# Allegro board arduino_mega_tft_3p5_shield.brd
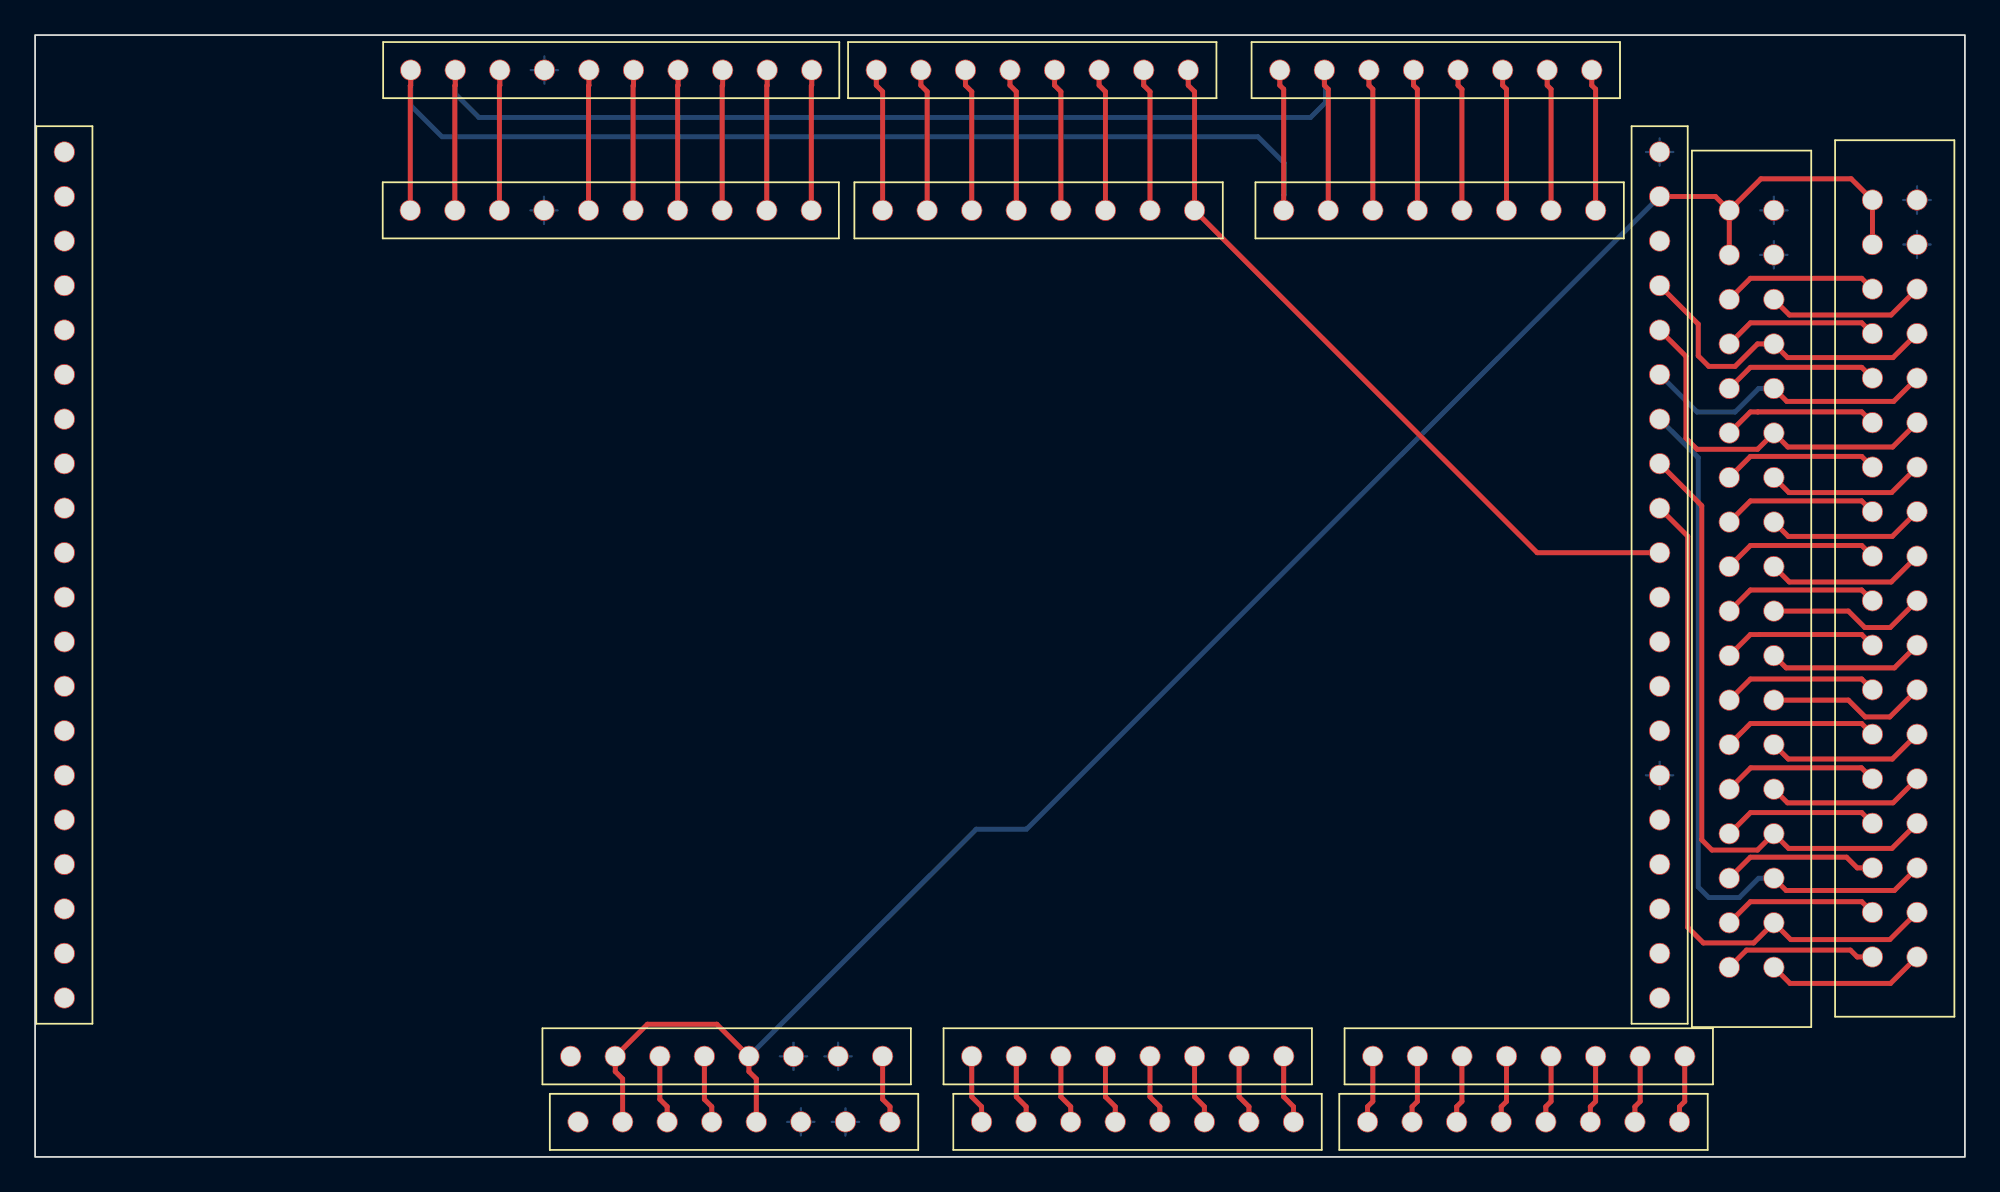
[diagram p0: board, top side]
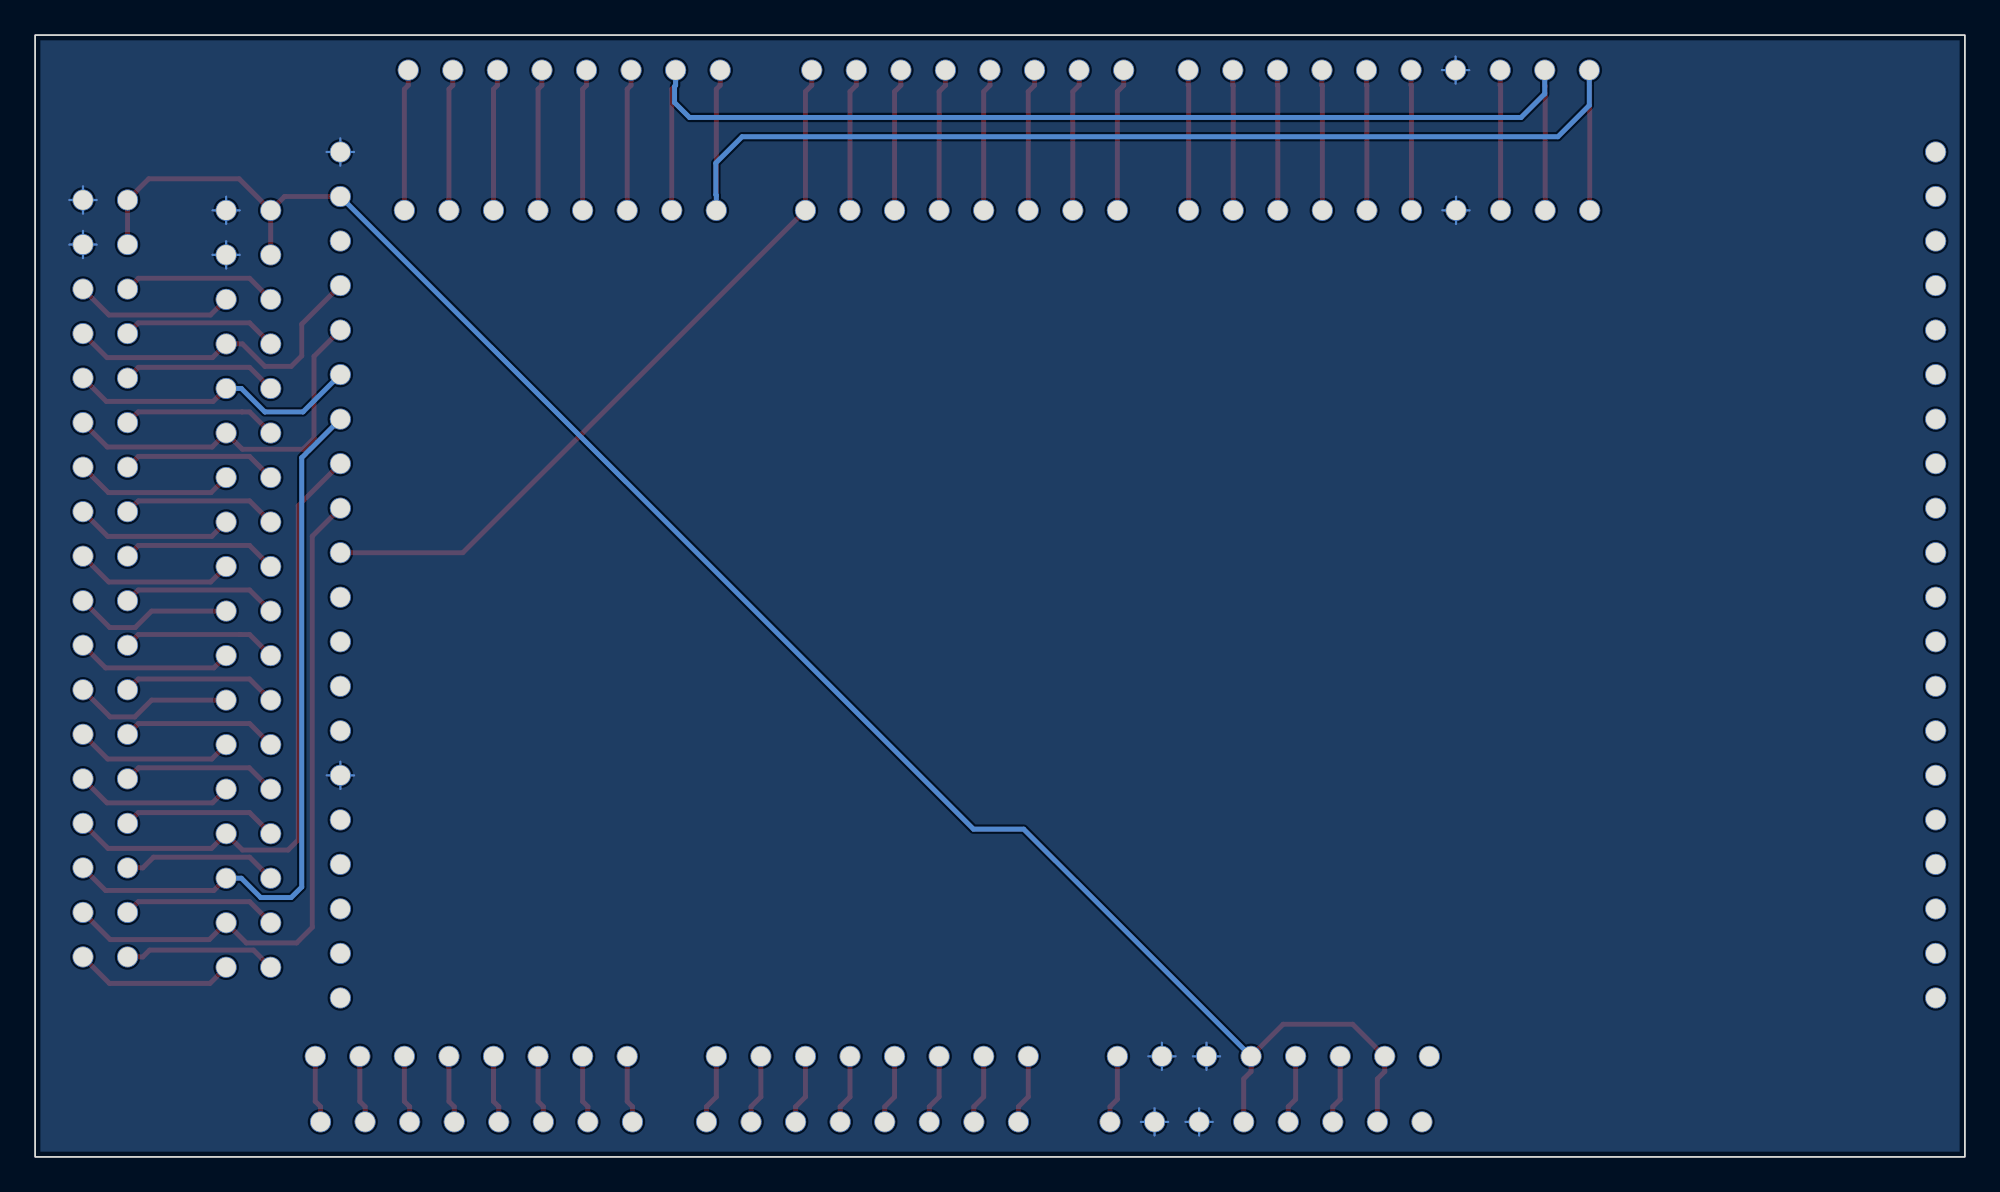
[diagram p1: board, bottom side, seen from below]

Outline 110 x 64 mm; copper layers: TOP, BOTTOM. Coordinates in mm from the lower left corner of the outline.
Outline path: rectangle 0,0 110,64

## Design rules (mm)
constraint set DEFAULT: min track width 0.127

## Placement (name value [footprint] x y rotation side)
ADCH  FH254-108DF08500V  [1X08]  84.84 2 90 top
ADCH1  FH254-108DF08500V  [1X08]  85.14 5.74 90 top
ADCL  FH254-108DF08500V  [1X08]  62.28 5.74 90 top
ADCL1  FH254-108DF08500V  [1X08]  62.84 2 90 top
COMMUNICATION  FH254-108DF08500V  [1X08]  79.84 62 90 top
COMMUNICATION1  FH254-108DF08500V  [1X08]  80.06 54 90 top
JP1  N_A  [1X20]  1.67 33.2 0 top
JP2  N_A  [1X20]  92.6 33.2 0 top
JP6  FH254-110DF08500V  [1X10]  32.82 54 90 top
JP7  FH254-110DF08500V  [1X10]  32.84 62 90 top
NOREF  -  []  48.31 5.74 0 top
NOREF#2  -  []  0 64 0 top
NOREF#3  -  []  1.67 33.2 0 top
NOREF#4  -  []  88.95 54 0 top
NOREF#5  -  []  44.25 54 0 top
NOREF#6  -  []  66.09 54 0 top
NOREF#7  -  []  76.25 5.74 90 top
NOREF#8  -  []  1.67 33.2 0 top
NOREF#9  -  []  76.25 5.74 90 top
NOREF#10  -  []  71.17 5.74 0 top
NOREF#11  -  []  94.03 5.74 0 top
NOREF#12  -  []  0 0 90 top
POWER  FH254-108DF08500V  [1X08]  39.42 5.74 90 top
POWER1  FH254-108DF08500V  [1X08]  39.84 2 90 top
PWML  FH254-108DF08500V  [1X08]  57.2 54 90 top
PWML1  FH254-108DF08500V  [1X08]  56.84 62 90 top
XIO  18x2F-H8.5  [2X18]  106 33 0 top
XIO1  18x2F-H8.5  [2X18]  97.84 32.41 0 top

## Library data of the parts
ADCH ADCH1 ADCL ADCL1 COMMUNICATION COMMUNICATION1 = 0058_FH254-108DF08500V
JP1 JP2 = HEADER-1X20_ROUND
JP6 JP7 = 1216_FH254-110DF08500T30
POWER POWER1 = 1217_FH254-108DF08500T21
PWML PWML1 = 1218_FH254-108DF08500T20
XIO XIO1 = 0060_FH254-218DF08500V

## Footprints (pads in the part's own frame, mm; a bottom-side part is the same pattern mirrored in y, then rotated)
1X08
  round 1.2 hole 1.1: 1(0,8.89) 2(0,6.35) 3(0,3.81) 4(0,1.27) 5(0,-1.27) 6(0,-3.81) 7(0,-6.35) 8(0,-8.89)
1X10
  round 1.2 hole 1.1: 1(0,11.43) 2(0,8.89) 3(0,6.35) 4(0,3.81) 5(0,1.27) 6(0,-1.27) 7(0,-3.81) 8(0,-6.35) 9(0,-8.89) 10(0,-11.43)
1X20
  round 1.2 hole 1.1: 1(0,24.13) 2(0,21.59) 3(0,19.05) 4(0,16.51) 5(0,13.97) 6(0,11.43) 7(0,8.89) 8(0,6.35) 9(0,3.81) 10(0,1.27) 11(0,-1.27) 12(0,-3.81) 13(0,-6.35) 14(0,-8.89) 15(0,-11.43) 16(0,-13.97) 17(0,-16.51) 18(0,-19.05) 19(0,-21.59) 20(0,-24.13)
2X18
  round 1.2 hole 1.1: 1(-1.27,21.59) 2(-1.27,19.05) 3(-1.27,16.51) 4(-1.27,13.97) 5(-1.27,11.43) 6(-1.27,8.89) 7(-1.27,6.35) 8(-1.27,3.81) 9(-1.27,1.27) 10(-1.27,-1.27) 11(-1.27,-3.81) 12(-1.27,-6.35) 13(-1.27,-8.89) 14(-1.27,-11.43) 15(-1.27,-13.97) 16(-1.27,-16.51) 17(-1.27,-19.05) 18(-1.27,-21.59) 19(1.27,-21.59) 20(1.27,-19.05) 21(1.27,-16.51) 22(1.27,-13.97) 23(1.27,-11.43) 24(1.27,-8.89) 25(1.27,-6.35) 26(1.27,-3.81) 27(1.27,-1.27) 28(1.27,1.27) 29(1.27,3.81) 30(1.27,6.35) 31(1.27,8.89) 32(1.27,11.43) 33(1.27,13.97) 34(1.27,16.51) 35(1.27,19.05) 36(1.27,21.59)

## Nets
+3V3: POWER.4 POWER1.4
+5V: JP2.2 POWER.2 POWER.5 POWER1.2 POWER1.5 XIO.1 XIO.2 XIO1.1 XIO1.2
GND: JP2.1 JP2.15 JP6.4 JP7.4 POWER.6 POWER.7 POWER1.6 POWER1.7 XIO.35 XIO.36 XIO1.35 XIO1.36
VCC: JP2.3
VIN: POWER.8 POWER1.8
ADC0: ADCL.1 ADCL1.1
ADC1: ADCL.2 ADCL1.2
ADC2: ADCL.3 ADCL1.3
ADC3: ADCL.4 ADCL1.4
ADC4: ADCL.5 ADCL1.5
ADC5: ADCL.6 ADCL1.6
ADC6: ADCL.7 ADCL1.7
ADC7: ADCL.8 ADCL1.8
ADC8: ADCH.1 ADCH1.1
ADC9: ADCH.2 ADCH1.2
ADC10: ADCH.3 ADCH1.3
ADC11: ADCH.4 ADCH1.4
ADC12: ADCH.5 ADCH1.5
ADC13: ADCH.6 ADCH1.6
ADC14: ADCH.7 ADCH1.7
ADC15: ADCH.8 ADCH1.8
AREF: JP6.3 JP7.3
LCD_X+: JP2.12
LCD_X-: JP2.14
LCD_Y+: JP2.11
LCD_Y-: JP2.13
PA0: XIO.3 XIO1.3
PA1: XIO.4 XIO1.4
PA2: XIO.5 XIO1.5
PA3: XIO.6 XIO1.6
PA4: XIO.7 XIO1.7
PA5: XIO.8 XIO1.8
PA6: XIO.9 XIO1.9
PA7: XIO.10 XIO1.10
PB0: XIO.34 XIO1.34
PB1: JP2.4 XIO.33 XIO1.33
PB2: JP2.6 XIO.32 XIO1.32
PB3: JP2.5 XIO.31 XIO1.31
PC0: XIO.18 XIO1.18
PC1: XIO.17 XIO1.17
PC2: XIO.16 XIO1.16
PC3: XIO.15 XIO1.15
PC4: XIO.14 XIO1.14
PC5: XIO.13 XIO1.13
PC6: XIO.12 XIO1.12
PC7: XIO.11 XIO1.11
PD7: XIO.19 XIO1.19
PE0: PWML.1 PWML1.1
PE1: PWML.2 PWML1.2
PE3: PWML.6 PWML1.6
PE4: PWML.3 PWML1.3
PE5: PWML.4 PWML1.4
PG0: JP2.8 XIO.22 XIO1.22
PG1: JP2.7 XIO.21 XIO1.21
PG2: JP2.9 XIO.20 XIO1.20
PG5: PWML.5 PWML1.5
PH3: PWML.7 PWML1.7
PH4: JP2.10 PWML.8 PWML1.8
PH5: JP6.10 JP7.10
PH6: JP6.9 JP7.9
PL0: XIO.30 XIO1.30
PL1: XIO.29 XIO1.29
PL2: XIO.28 XIO1.28
PL3: XIO.27 XIO1.27
PL4: XIO.26 XIO1.26
PL5: XIO.25 XIO1.25
PL6: XIO.24 XIO1.24
PL7: XIO.23 XIO1.23
RESET: POWER.3 POWER1.3
RXD1: COMMUNICATION.3 COMMUNICATION1.3
RXD2: COMMUNICATION.5 COMMUNICATION1.5
RXD3: COMMUNICATION.7 COMMUNICATION1.7
SCL: COMMUNICATION.1 COMMUNICATION1.1 JP6.1 JP7.1
SDA: COMMUNICATION.2 COMMUNICATION1.2 JP6.2 JP7.2
TXD1: COMMUNICATION.4 COMMUNICATION1.4
TXD2: COMMUNICATION.6 COMMUNICATION1.6
TXD3: COMMUNICATION.8 COMMUNICATION1.8
N10318: JP6.5 JP7.5
N10322: JP6.6 JP7.6
N10326: JP6.7 JP7.7
N10330: JP6.8 JP7.8

Pads without a net: JP1 1 2 3 4 5 6 7 8 9 10 11 12 13 14 15 16 17 18 19 20; JP2 16 17 18 19 20; POWER 1; POWER1 1

## Routing (per net, layer and track width the routed paths; a pad name or vN(x,y) marks a point on that pad's centre or on a via; arc(x,y) is an arc through that point)
+3V3: length 3.9
  TOP w0.281: POWER.4 38.15,3.29 38.57,2.87 POWER1.4
+5V: length 108
  TOP w0.281: XIO1.1 95.78,54.79 JP2.2 ; XIO1.1 98.37,55.8 103.52,55.8 XIO.1 XIO.2 ; XIO1.1 XIO1.2 ; POWER1.5 41.11,4.45 40.69,4.87 POWER.5 38.86,7.57 34.9,7.57 POWER.2 33.07,4.87 33.49,4.45 POWER1.2
  BOTTOM w0.281: POWER.5 53.65,18.7 56.51,18.7 JP2.2
GND: length 37.3
  BOTTOM w0.127: 98.33,51.46 XIO1.35 ; XIO1.35 99.11,52.24 ; XIO1.35 99.89,51.46 ; XIO1.35 99.11,50.68 ; XIO1.36 99.11,54.78 ; XIO1.36 98.33,54 ; XIO1.36 99.11,53.22 ; XIO1.36 99.89,54 ; XIO.36 108.05,54.59 ; XIO.36 107.27,55.37 ; XIO.36 106.49,54.59 ; XIO.36 107.27,53.81 ; POWER1.7 46.97,2 ; POWER1.7 46.19,2.78 ; POWER1.7 46.19,1.22 ; POWER1.7 45.41,2 ; POWER.7 45.77,6.52 ; POWER.7 46.55,5.74 ; POWER.7 44.99,5.74 ; POWER.7 45.77,4.96 ; 28.25,62 JP7.4 ; JP7.4 29.03,61.22 ; JP7.4 29.03,62.78 ; JP7.4 29.81,62 ; JP2.1 93.38,57.33 ; JP2.1 92.6,58.11 ; JP2.1 91.82,57.33 ; JP2.1 92.6,56.55 ; JP6.4 29.78,54 ; JP6.4 28.23,54 ; JP6.4 29.01,53.22 ; JP6.4 29.01,54.78 ; 91.82,21.77 JP2.15 ; JP2.15 92.6,20.99 ; JP2.15 92.6,22.55 ; JP2.15 93.38,21.77 ; POWER1.6 44.43,2 ; POWER1.6 42.87,2 ; POWER1.6 43.65,2.78 ; POWER1.6 43.65,1.22 ; 106.49,52.05 XIO.35 ; XIO.35 107.27,52.83 ; XIO.35 107.27,51.27 ; XIO.35 108.05,52.05 ; POWER.6 44.01,5.74 ; POWER.6 43.23,6.52 ; POWER.6 42.45,5.74 ; POWER.6 43.23,4.96
VIN: length 3.9
  TOP w0.281: POWER1.8 48.73,2.87 48.31,3.29 POWER.8
ADC0: length 4
  TOP w0.281: ADCL.1 53.39,3.43 53.95,2.87 ADCL1.1
ADC1: length 4
  TOP w0.281: ADCL.2 55.93,3.43 56.49,2.87 ADCL1.2
ADC2: length 4
  TOP w0.281: ADCL.3 58.47,3.43 59.03,2.87 ADCL1.3
ADC3: length 4
  TOP w0.281: ADCL1.4 61.57,2.87 61.01,3.43 ADCL.4
ADC4: length 4
  TOP w0.281: ADCL.5 63.55,3.43 64.11,2.87 ADCL1.5
ADC5: length 4
  TOP w0.281: ADCL.6 66.09,3.43 66.65,2.87 ADCL1.6
ADC6: length 4
  TOP w0.281: ADCL1.7 69.19,2.87 68.63,3.43 ADCL.7
ADC7: length 4
  TOP w0.281: ADCL1.8 71.73,2.87 71.17,3.43 ADCL.8
ADC8: length 3.9
  TOP w0.281: ADCH1.1 76.25,3.17 75.95,2.87 ADCH.1
ADC9: length 3.9
  TOP w0.281: ADCH1.2 78.79,3.17 78.49,2.87 ADCH.2
ADC10: length 3.9
  TOP w0.281: ADCH1.3 81.33,3.17 81.03,2.87 ADCH.3
ADC11: length 3.9
  TOP w0.281: ADCH.4 83.57,2.87 83.87,3.17 ADCH1.4
ADC12: length 3.9
  TOP w0.281: ADCH.5 86.11,2.87 86.41,3.17 ADCH1.5
ADC13: length 3.9
  TOP w0.281: ADCH.6 88.65,2.87 88.95,3.17 ADCH1.6
ADC14: length 3.9
  TOP w0.281: ADCH.7 91.19,2.87 91.49,3.17 ADCH1.7
ADC15: length 3.9
  TOP w0.281: ADCH1.8 94.03,3.17 93.73,2.87 ADCH.8
AREF: length 8
  TOP w0.281: JP6.3 26.47,61.11 26.49,61.13 JP7.3
PA0: length 8.9
  TOP w0.281: XIO1.3 97.77,50.12 104.12,50.12 XIO.3
PA1: length 8.9
  TOP w0.281: XIO1.4 97.77,47.58 104.12,47.58 XIO.4
PA2: length 8.9
  TOP w0.281: XIO.5 104.12,45.04 97.77,45.04 XIO1.5
PA3: length 8.9
  TOP w0.281: XIO1.6 97.77,42.5 98.2,42.5 98.2,42.5 104.12,42.5 XIO.6
PA4: length 8.9
  TOP w0.281: XIO.7 104.12,39.96 97.77,39.96 XIO1.7
PA5: length 8.9
  TOP w0.281: XIO.8 104.12,37.42 97.77,37.42 XIO1.8
PA6: length 8.9
  TOP w0.281: XIO1.9 97.77,34.88 104.12,34.88 XIO.9
PA7: length 8.9
  TOP w0.281: XIO1.10 97.77,32.34 104.12,32.34 XIO.10
PB0: length 9.1
  TOP w0.281: XIO1.34 100,48.03 105.79,48.03 XIO.34
PB1: length 19.1
  TOP w0.281: JP2.4 94.8,47.51 94.8,45.7 95.4,45.1 96.9,45.1 98.18,46.38 XIO1.33 99.89,45.6 105.9,45.6 XIO.33
PB2: length 17
  TOP w0.281: XIO.32 105.94,43.1 99.85,43.1 XIO1.32
  BOTTOM w0.281: XIO1.32 98.24,43.84 96.9,42.5 94.73,42.5 JP2.6
PB3: length 21.5
  TOP w0.281: JP2.5 94.1,45.67 94.1,41 94.73,40.37 98.18,40.37 XIO1.31 99.91,40.5 105.88,40.5 XIO.31
PC0: length 8.7
  TOP w0.281: XIO.18 103.86,11.41 103.47,11.8 97.55,11.8 XIO1.18
PC1: length 8.9
  TOP w0.281: XIO1.17 97.77,14.56 104.12,14.56 XIO.17
PC2: length 8.9
  TOP w0.281: XIO.16 103.86,16.49 103.25,17.1 97.77,17.1 XIO1.16
PC3: length 8.9
  TOP w0.281: XIO1.15 97.77,19.64 104.12,19.64 XIO.15
PC4: length 8.9
  TOP w0.281: XIO.14 104.1,22.2 97.79,22.2 XIO1.14
PC5: length 8.9
  TOP w0.281: XIO.13 104.12,24.72 97.77,24.72 XIO1.13
PC6: length 8.9
  TOP w0.281: XIO.12 104.12,27.26 97.77,27.26 XIO1.12
PC7: length 8.9
  TOP w0.281: XIO1.11 97.77,29.8 98.3,29.8 98.3,29.8 104.12,29.8 XIO.11
PD7: length 9.2
  TOP w0.281: XIO.19 105.76,9.9 100.03,9.9 XIO1.19
PE0: length 8.1
  TOP w0.281: PWML1.1 47.95,61.13 48.31,60.77 PWML.1
PE1: length 8.1
  TOP w0.281: PWML1.2 50.49,61.13 50.85,60.77 PWML.2
PE3: length 8.1
  TOP w0.281: PWML1.6 60.65,61.13 61.01,60.77 PWML.6
PE4: length 8.1
  TOP w0.281: PWML1.3 53.03,61.13 53.39,60.77 PWML.3
PE5: length 8.1
  TOP w0.281: PWML1.4 55.57,61.13 55.93,60.77 PWML.4
PG0: length 36.3
  TOP w0.281: JP2.8 95,37.15 95,18.09 95.58,17.51 98.18,17.51 XIO1.22 99.95,17.6 105.84,17.6 XIO.22
PG1: length 41.6
  TOP w0.281: XIO1.21 99.81,15.2 105.98,15.2 XIO.21
  BOTTOM w0.281: XIO1.21 98.24,15.9 97.14,14.8 95.4,14.8 94.8,15.4 94.8,39.89 JP2.7
PG2: length 39.5
  TOP w0.281: JP2.9 94.2,35.41 94.2,13.1 95.09,12.21 97.96,12.21 XIO1.20 100.07,12.4 105.72,12.4 XIO.20
PG5: length 8.1
  TOP w0.281: PWML1.5 58.11,61.13 58.47,60.77 PWML.5
PH3: length 8.1
  TOP w0.281: PWML.7 63.55,60.77 63.19,61.13 PWML1.7
PH4: length 42.7
  TOP w0.281: JP2.10 85.62,34.47 PWML.8 66.09,60.77 65.73,61.13 PWML1.8
PH5: length 8
  TOP w0.281: JP7.10 44.27,61.13 44.25,61.11 JP6.10
PH6: length 8
  TOP w0.281: JP7.9 41.73,61.13 41.71,61.11 JP6.9
PL0: length 9.1
  TOP w0.281: XIO.30 105.82,37.9 99.97,37.9 XIO1.30
PL1: length 9.1
  TOP w0.281: XIO1.29 99.93,35.4 105.86,35.4 XIO.29
PL2: length 9.1
  TOP w0.281: XIO1.28 99.99,32.8 105.8,32.8 XIO.28
PL3: length 9.2
  TOP w0.281: XIO.27 105.74,30.2 104.3,30.2 103.36,31.14 XIO1.27
PL4: length 9
  TOP w0.281: XIO1.26 99.81,27.9 105.98,27.9 XIO.26
PL5: length 9.2
  TOP w0.281: XIO1.25 103.36,26.06 104.32,25.1 105.72,25.1 XIO.25
PL6: length 9.1
  TOP w0.281: XIO1.24 99.93,22.7 105.86,22.7 XIO.24
PL7: length 9.1
  TOP w0.281: XIO1.23 99.89,20.2 105.9,20.2 XIO.23
RESET: length 3.9
  TOP w0.281: POWER1.3 36.03,2.87 35.61,3.29 POWER.3
RXD1: length 8.1
  TOP w0.281: COMMUNICATION1.3 76.25,60.91 76.03,61.13 COMMUNICATION.3
RXD2: length 8.1
  TOP w0.281: COMMUNICATION1.5 81.33,60.91 81.11,61.13 COMMUNICATION.5
RXD3: length 8.1
  TOP w0.281: COMMUNICATION.7 86.19,61.13 86.41,60.91 COMMUNICATION1.7
SCL: length 72
  TOP w0.281: COMMUNICATION.1 70.95,61.13 71.17,60.91 COMMUNICATION1.1 ; JP7.1 21.41,61.13 21.39,61.11 JP6.1
  BOTTOM w0.281: JP7.1 21.41,59.99 23.2,58.2 69.7,58.2 71.2,56.7 71.2,54.9 71.17,54.87 COMMUNICATION1.1
SDA: length 69.8
  TOP w0.281: COMMUNICATION.2 73.49,61.13 73.71,60.91 COMMUNICATION1.2 ; JP6.2 23.93,61.11 23.95,61.13 JP7.2
  BOTTOM w0.281: COMMUNICATION.2 73.49,61.13 73.55,61.07 73.55,60.15 72.7,59.3 25.3,59.3 23.95,60.65 JP7.2
TXD1: length 8.1
  TOP w0.281: COMMUNICATION.4 78.57,61.13 78.79,60.91 COMMUNICATION1.4
TXD2: length 8.1
  TOP w0.281: COMMUNICATION1.6 83.87,60.91 83.65,61.13 COMMUNICATION.6
TXD3: length 8.1
  TOP w0.281: COMMUNICATION1.8 88.95,60.91 88.73,61.13 COMMUNICATION.8
N10318: length 8
  TOP w0.281: JP7.5 31.57,61.13 31.55,61.11 JP6.5
N10322: length 8
  TOP w0.281: JP6.6 34.09,61.11 34.11,61.13 JP7.6
N10326: length 8
  TOP w0.281: JP6.7 36.63,61.11 36.65,61.13 JP7.7
N10330: length 8
  TOP w0.281: JP7.8 39.19,61.13 39.17,61.11 JP6.8

## Copper pours and planes (outline as drawn; the poured copper is in the pictures)
GND on BOTTOM: 0.3,63.7 109.7,63.7 109.7,0.3 0.3,0.3
